# Altium PCB BlankUSB_radarESP12F.PcbDoc
Units mm, origin at the board's own origin, x right, y up, seen from the top; angles counter-clockwise.
Board outline 41.53 x 64.52 mm, 2 copper layers (Top Layer, Bottom Layer), stack 1.671 mm thick; 52 components, 30 nets, 153 pads, 30 vias.
Unrouted connection lines stored in the file: 1.
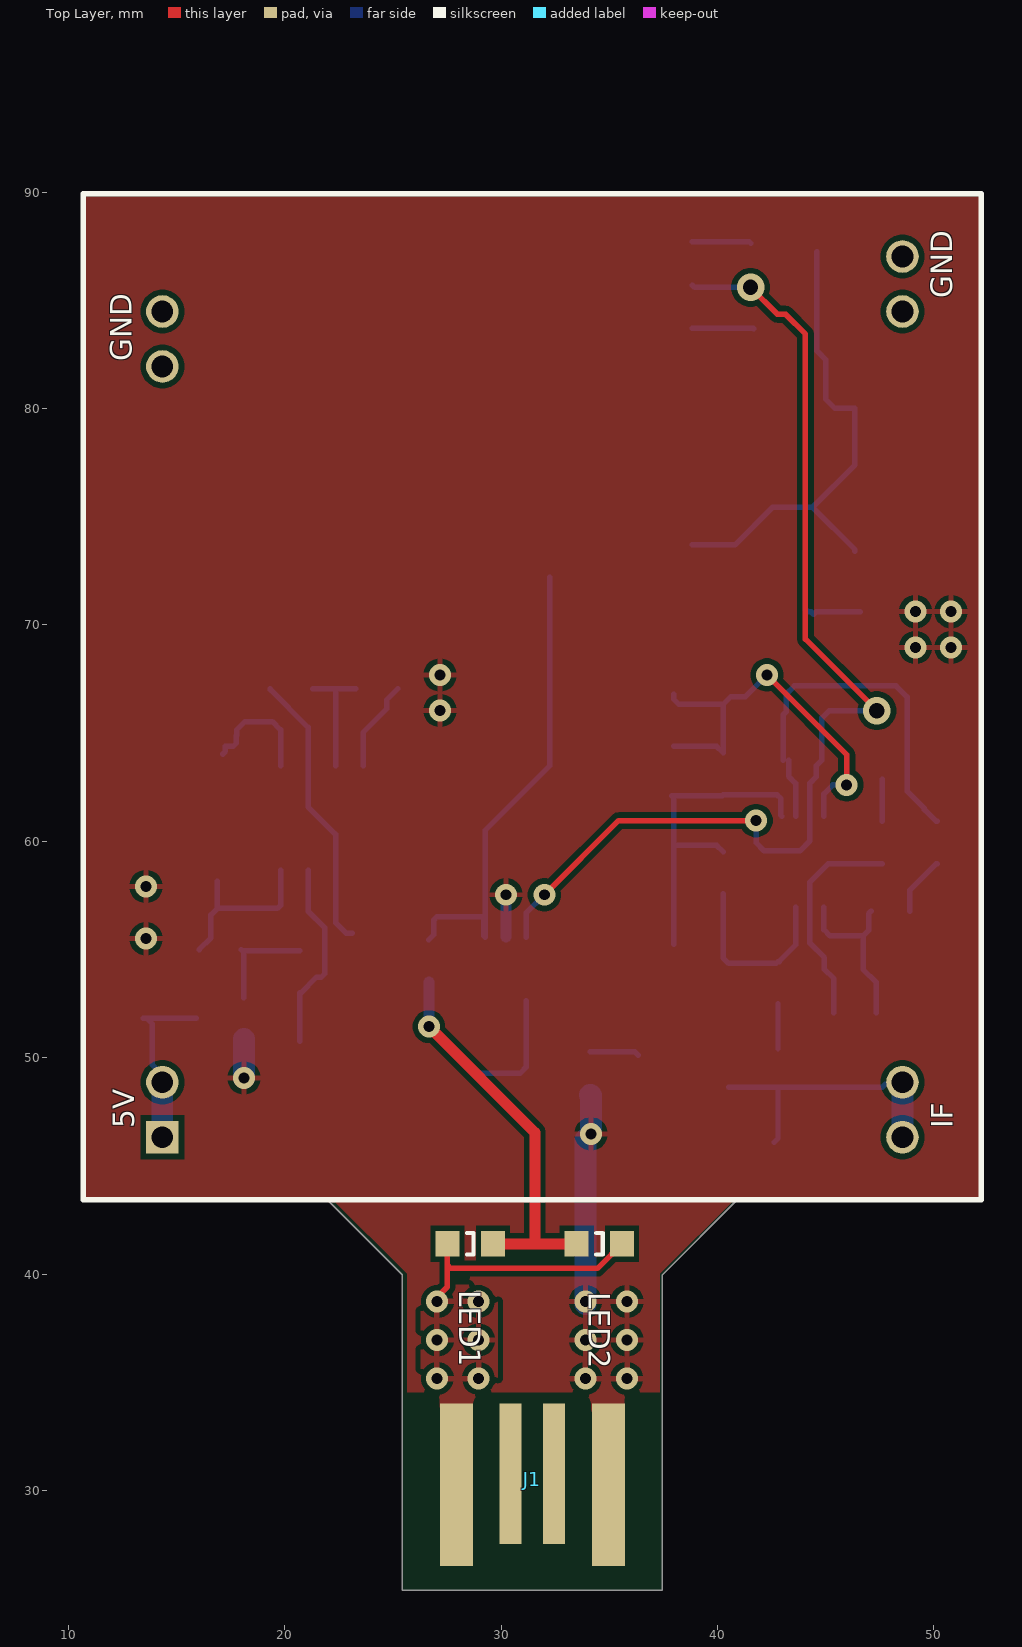
[diagram p0: Top Layer view]
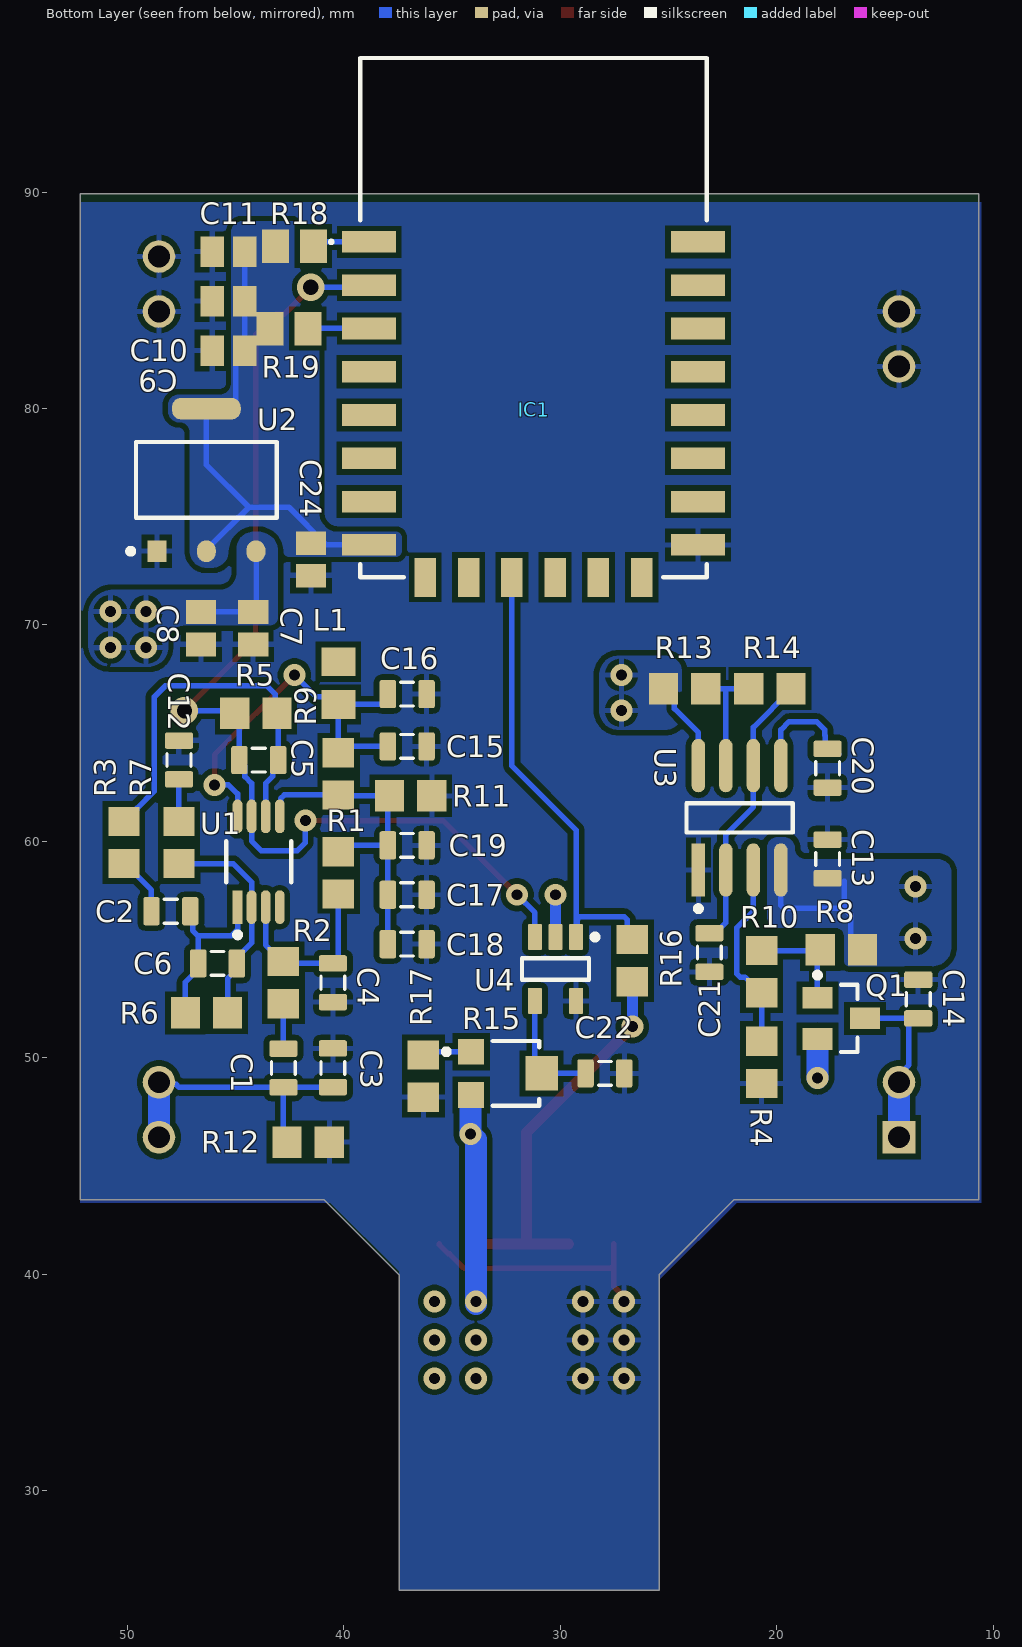
[diagram p1: Bottom Layer view, seen from below]
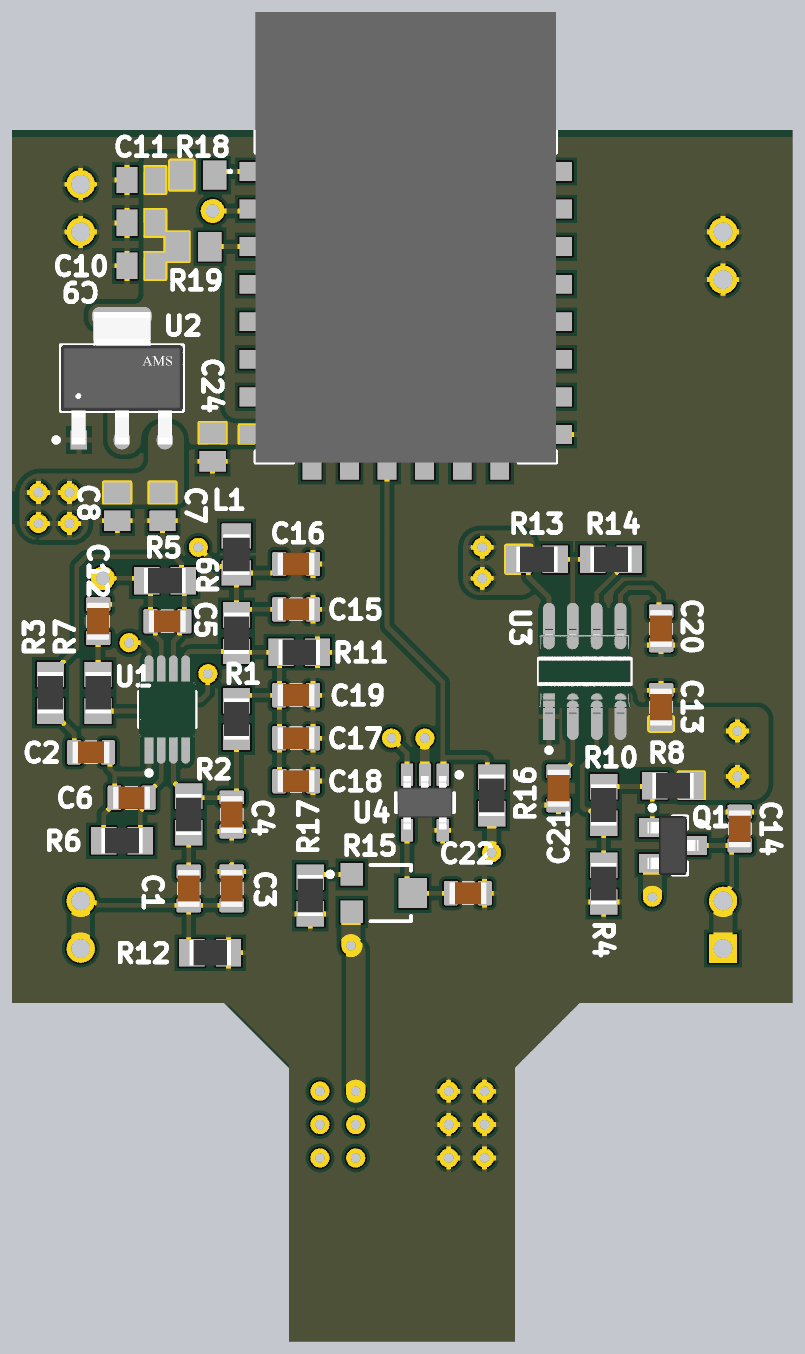
[diagram p2: 3D render of the assembled board from below, using the file's embedded part models]

## Layer stack, top to bottom
Top Solder: solder mask 0.0102, Solder Resist, Dk 3.5
Top Layer: signal copper 0.0356
Dielectric 1: dielectric 1.6, FR-4, Dk 4.8
Bottom Layer: signal copper 0.0356
Bottom Solder: solder mask 0.0102, Solder Resist, Dk 3.5

## Board outline
25.435,39.97 21.971,43.434 10.668,43.434 10.668,89.916 52.197,89.916 52.197,43.434 40.919,43.434 37.455,39.97 37.455,25.4 25.435,25.4

## Design rules (kind name [scope] priority, off if disabled: settings)
Clearance [All] p1: gap=0.254 ignorepadtopadclearanceinfootprint=FALSE
ComponentClearance [All] p1: gap=0.051 collisioncheckmode=3 verticalgap=0.051 showdistances=TRUE donotcheckwithout3dbody=TRUE checkcomponentboundary=TRUE
PolygonConnect PolygonConnect_2 [All vs IsNamedPolygon('VCC_L02_P008')] p1: thpad.connectstyle=Direct thpad.reliefconductorwidth=0.254 thpad.reliefentries=4 thpad.polygonreliefangle="90 Angle" thpad.airgapwidth=0.254 smdpad.connectstyle=Direct smdpad.reliefconductorwidth=0.254 smdpad.reliefentries=4 smdpad.polygonreliefangle="90 Angle" smdpad.airgapwidth=0.254 via.connectstyle=Relief via.reliefconductorwidth=0.254 via.reliefentries=4 via.polygonreliefangle="90 Angle" via.airgapwidth=0.254
PolygonConnect A [All vs IsNamedPolygon('+5_L01_P013') Or IsNamedPolygon('GND_L01_P011')] p2: thpad.connectstyle=Direct thpad.reliefconductorwidth=0.254 thpad.reliefentries=4 thpad.polygonreliefangle="90 Angle" thpad.airgapwidth=0.254 smdpad.connectstyle=Direct smdpad.reliefconductorwidth=0.254 smdpad.reliefentries=4 smdpad.polygonreliefangle="90 Angle" smdpad.airgapwidth=0.254 via.connectstyle=Relief via.reliefconductorwidth=0.254 via.reliefentries=4 via.polygonreliefangle="90 Angle" via.airgapwidth=0.254
PolygonConnect PolygonConnect_1 [All vs IsNamedPolygon('+5_L01_P013') Or IsNamedPolygon('GND_L01_P011') Or IsNamedPolygon('+5_L02_P003') Or IsNamedPolygon('+5_L02_P009') Or IsNamedPolygon('+5_L02_P010') Or IsNamedPolygon('VCC_L02_P008')] p3: thpad.connectstyle=Direct thpad.reliefconductorwidth=0.254 thpad.reliefentries=4 thpad.polygonreliefangle="90 Angle" thpad.airgapwidth=0.254 smdpad.connectstyle=Direct smdpad.reliefconductorwidth=0.254 smdpad.reliefentries=4 smdpad.polygonreliefangle="90 Angle" smdpad.airgapwidth=0.254 via.connectstyle=Relief via.reliefconductorwidth=0.254 via.reliefentries=4 via.polygonreliefangle="90 Angle" via.airgapwidth=0.254
PolygonConnect [All] p4: connectstyle=Relief reliefconductorwidth=0.254 reliefentries=4 polygonreliefangle="90 Angle" airgapwidth=0.254
RoutingVias [All] p1: holewidth=0.711 width=1.27 viastyle="Through Hole" minholewidth=0.711 minwidth=1.27 maxholewidth=0.711 maxwidth=1.27
SolderMaskExpansion [All] p1: expansion=0.102 istentingtop=FALSE
Width [All] p1: maxlimit=5.08 minlimit=0.254 preferedwidth=0.254
29 further rules are at their usual default settings.

## Classes and differential pairs
net class POWER: +5 HB100-5V

## Components (designator, comment, footprint, x,y, rotation, side; value= is the part's Value field where it differs from the comment)
C1 "" CAPC0805(2012)145_L 42.799,49.53 r90 bottom value=4.7uF
C2 "" CAPC0805(2012)145_L 48.006,56.769 r0 bottom value=4.7uF
C3 "" CAPC0805(2012)145_L 40.513,49.53 r270 bottom value=100nF
C4 "" CAPC0805(2012)145_L 40.513,53.467 r90 bottom value=100nF
C5 "" CAPC0805(2012)145_L 43.941,63.754 r0 bottom value=2.2n
C6 "" CAPC0805(2012)145_L 45.847,54.356 r0 bottom value=2.2nF
C7 "Cap Pol3" C0805 44.196,69.85 r270 bottom value=100u
C8 "Cap Pol3" C0805 46.609,69.851 r270 bottom value=1u
C9 "Cap Pol3" C0805 45.34,82.677 r0 bottom value=100u
C10 "Cap Pol3" C0805 45.34,84.963 r0 bottom value=10u
C11 "Cap Pol3" C0805 45.339,87.249 r0 bottom value=1u
C12 "" CAPC0805(2012)145_L 47.625,63.754 r270 bottom value=4.7uF
C13 "" CAPC0805(2012)145_L 17.653,59.182 r270 bottom value=100uF
C14 "" CAPC0805(2012)145_L 13.462,52.705 r270 bottom value=100nF
C15 "" CAPC0805(2012)145_L 37.084,64.389 r0 bottom value=1uF
C16 "" CAPC0805(2012)145_L 37.084,66.802 r0 bottom value=100nF
C17 "" CAPC0805(2012)145_L 37.084,57.531 r0 bottom value=100uF
C18 "" CAPC0805(2012)145_L 37.084,55.245 r0 bottom value=1uF
C19 "" CAPC0805(2012)145_L 37.084,59.817 r0 bottom value=100nF
C20 "" CAPC0805(2012)145_L 17.653,63.373 r270 bottom value=10nF
C21 "25nF" CAPC0805(2012)145_L 23.114,54.864 r90 bottom
C22 "" CAPC0805(2012)145_L 27.937,49.276 r180 bottom value=10uF
C24 "Cap Pol3" C0805 41.529,73.025 r270 bottom value=100n
IC1 "esp-12f" esp12f 31.242,84.201 r180 bottom locked
J1 "USB-A" USB-A-PCB 31.455,30.462 r90 top locked
L1 "BLM21PG331SN1D" INDC2013X105X50ML20T20 40.259,67.31 r270 bottom
LED1 "150080SS75000" 0805_A 28.575,41.402 r180 top
LED2 "150080SS75000" 0805_A 34.544,41.402 r180 top
Q1 "MMBT3906" FAIR-SOT23-3_V 17.018,51.816 r180 bottom
R1 "" RESC2013X70X40ML20T20 40.259,58.547 r90 bottom value=330k
R2 "" RESC2013X70X40ML20T20 42.799,53.467 r90 bottom value=12k
R3 "" RESC2013X70X40ML20T20 50.165,59.944 r90 bottom value=8.2k
R4 "" RESC2013X70X40ML20T20 20.701,49.784 r90 bottom value=1Meg
R5 "" RESC2013X70X40ML20T20 44.069,65.913 r0 bottom value=1Meg
R6 "" RESC2013X70X40ML20T20 46.355,52.07 r0 bottom value=1Meg
R7 "" RESC2013X70X40ML20T20 47.625,59.944 r270 bottom value=10k
R8 "" RESC2013X70X40ML20T20 17.018,54.991 r180 bottom value=10k
R9 "" RESC2013X70X40ML20T20 40.259,63.119 r90 bottom value=100k
R10 "" RESC2013X70X40ML20T20 20.701,53.975 r90 bottom value=10k
R11 "" RESC2013X70X40ML20T20 36.916,62.103 r0 bottom value=100k
R12 "" RESC2013X70X40ML20T20 41.656,46.101 r0 bottom value=12k
R13 "" RESC2013X70X40ML20T20 24.257,67.056 r0 bottom value=50k
R14 "" RESC2013X70X40ML20T20 20.32,67.056 r0 bottom value=2k
R15 "35WR10KLFTR" BI-35WR10KLFTR-3_V 32.52,49.276 r180 bottom
R16 "" RESC2013X70X40ML20T20 26.67,54.483 r90 bottom value=250
R17 "" RESC2013X70X40ML20T20 36.33,49.149 r90 bottom value=50k
R18 "10k" RESC2013X58X38NL25T25 42.291,87.503 r0 bottom
R19 "10k" RESC2013X58X38NL25T25 42.545,83.693 r0 bottom
U1 "LMV358IDGKR" FP-DGK0008A-IPC_B 43.942,59.055 r90 bottom
U2 "AMS1117-3.3" FP-AMS1117-IPC_C 46.359,76.701 r90 bottom
U3 "NE555DR" FP-D0008A-IPC_A 21.717,61.087 r90 bottom
U4 "LMC7211AIM5/NOPB" DBV0005A_M 30.226,54.102 r270 bottom

## Footprints (in the part's own frame and the unit in brackets; to place one, negate y for a bottom-side part, rotate by r counter-clockwise, add the part's x,y. Pads: shape width x height; smd on the part's side, far side on the other; paste and mask are expansions set on the pad)
0805_A [mm] "Chip LED, 2-Leads, Body 2.0x1.3mm, IPC Medium Density"
  rect 1.1x1.2 smd: 1(-1.05,0) 2(1.05,0)
  silkscreen extent -0.15,-0.5 0.15,0.5, body extent -1,-0.62 1,0.62, height 0.68
BI-35WR10KLFTR-3_V [mm] "SMD, 3-Leads, Body 3x3.1mm"
  rect 1.2x1.2 smd: 1(-1.6,1) 3(-1.6,-1)
  rect 1.5x1.6 smd: 2(1.65,0)
  silkscreen extent -2.88,-1.5 1.55,1.5, body extent -1.55,-1.5 1.55,1.5, height 1.8
C0805 [mm] "Chip Capacitor, Body 2.0x1.3mm, IPC High Density"
  rect 1.1x1.4 smd: 1(-0.75,0) 2(0.75,0)
  body extent -1.1,-0.72 1.1,0.72, height 1.4
CAPC0805(2012)145_L [mm] "Chip Capacitor, Body 2.0x1.2mm, Height 1.45mm, IPC High Density"
  rrect25% 0.76x1.3 smd: 1(-0.9,0) 2(0.89,0)
  silkscreen extent -0.3,-0.55 0.3,0.55, body extent -1,-0.6 1,0.6, height 1.45
DBV0005A_M [mm] "SOT23, 5-Leads, Body 3.05x1.75mm, Pitch 0.95mm, IPC Low Density"
  rrect15% 1.2x0.65 smd: 1(-1.475,0.95) 2(-1.475,0) 3(-1.475,-0.95) 4(1.475,-0.95) 5(1.475,0.95)
  silkscreen extent -1.6,-1.55 0.5,1.95, body extent -1.42,-1.46 1.42,1.46, height 1.08
esp12f [mm]
  rect 2.5x1 smd: 1(-7.6,3.5) 2(-7.6,1.5) 3(-7.6,-0.5) 4(-7.6,-2.5) 5(-7.6,-4.5) 6(-7.6,-6.5) 7(-7.6,-8.5) 8(-7.6,-10.5) 15(7.6,-10.5) 16(7.6,-8.5) 17(7.6,-6.5) 18(7.6,-4.5) 19(7.6,-2.5) 20(7.6,-0.5) 21(7.6,1.5) 22(7.6,3.5)
  rect 1x1.8 smd: 9(-5,-12) 10(-3,-12) 11(-1,-12) 12(1,-12) 13(3,-12) 14(5,-12)
  silkscreen extent -9.4,-12 8,12, body extent -8,-12 8,12, height 3.2
FAIR-SOT23-3_V [mm] "SOT23, 3-Leads, Body 3.12x1.5mm, Pitch 0.95mm"
  rect 1.4x1 smd: 1(-1.1,0.95) 2(-1.1,-0.95) 3(1.1,0)
  silkscreen extent -1.23,-1.55 0.75,2.12, body extent -1.35,-1.56 1.35,1.56, height 1.2
FP-AMS1117-IPC_C [mm]
  rect 1.004x0.872 smd paste+0 mask+0: 1(-3.295,2.29)
  rrect100% 1.004x0.872 smd paste+0 mask+0: 2(-3.295,0) 3(-3.295,-2.29)
  rrect87% 1.004x3.182 smd paste+0 mask+0: 4(3.295,0)
  silkscreen extent -3.42,-3.25 1.75,3.63, body extent -3.53,-3.25 3.53,3.25, height 1.8
FP-D0008A-IPC_A [mm]
  rect 2.469x0.622 smd paste+0 mask+0: 1(-2.414,1.905)
  rrect100% 2.469x0.622 smd paste+0 mask+0: 2(-2.414,0.635) 3(-2.414,-0.635) 4(-2.414,-1.905) 5(2.414,-1.905) 6(2.414,-0.635) 7(2.414,0.635) 8(2.414,1.905)
  silkscreen extent -4.32,-2.45 0.68,2.45, body extent -3,-2.45 3,2.45, height 1.75
FP-DGK0008A-IPC_B [mm]
  rect 1.557x0.458 smd paste+0 mask+0: 1(-2.101,0.975)
  rrect100% 1.557x0.458 smd paste+0 mask+0: 2(-2.101,0.325) 3(-2.101,-0.325) 4(-2.101,-0.975) 5(2.101,-0.975) 6(2.101,-0.325) 7(2.101,0.325) 8(2.101,0.975)
  silkscreen extent -3.5,-1.5 0.95,1.5, body extent -2.45,-1.5 2.45,1.5, height 1.1
INDC2013X105X50ML20T20 [mm] "Chip Inductor, 2-Leads, Body 2.2x1.45mm, IPC Low Density"
  rect 1.33x1.57 smd: 1(-0.985,0) 2(0.985,0)
  body extent -1.1,-0.72 1.1,0.72, height 1.05
RESC2013X58X38NL25T25 [mm] "Chip Resistor, 2-Leads, Body 2.03x1.27mm, IPC Medium Density"
  rect 1.25x1.55 smd: 1(-0.875,0) 2(0.875,0)
  body extent -1.14,-0.76 1.14,0.76, height 0.59
RESC2013X70X40ML20T20 [mm] "Chip Resistor, 2-Leads, Body 2.2x1.35mm, IPC Low Density"
  rect 1.35x1.45 smd: 1(-0.975,0) 2(0.975,0)
  body extent -1.1,-0.68 1.1,0.67, height 0.7
USB-A-PCB [mil]
  rect 296x60 smd paste-196.85: 1(-7.87,-137.8) 4(-7.87,138)
  rect 256x40 smd paste-196.85: 2(12,-39.37) 3(12,40)

## Part data
C1 C2 C3 C4 C5 C6 C12 C13 C14 C15 C16 C17 C18 C19 C20 C21 C22: library part CMP-001-00054-3, Case/Package=0805, Max Operating Temperature=85°C, Min Operating Temperature=-55°C, Tolerance=10%, Voltage Rating=6.3V, Mounting Technology=SMT, Pins=2
C7 C8 C9 C10 C11 C24: "Polarized Capacitor (Surface Mount)", LatestRevisionDate=29-May-2009, LatestRevisionNote="IPC-7351 Footprint Added.", PackageDescription="Chip Capacitor", PackageReference=C0805, Published=8-Jun-2000, Publisher="Altium Limited"
IC1: "Integrated Circuit", Manufacturer_Name=Ai-Thinker, Datasheet Link=https://docs.ai-thinker.com/_media/esp8266/docs/esp-12f_product_specification_en.pdf, Height=3.1mm, Manufacturer_Part_Number=esp-12f
J1: library part USB-A-PCB, "USB-A PCB footprint", Part number IPS=N.A., Artikkelnr Noca=N.A., ComponentLink1Description=Datasheet, ComponentLink2Description="Supplier link", Footprint Doc=USB-A-PCB, LatestRevisionDate=2014-06-04, Part Number=USB-A-PCB, Pin Count=4, Published=2014-06-04, Publisher="Nordic Semiconductor"
L1: library part CMP-006-00000-3, "IND, Chip Ferrite Bead, 330 Ohm, +/- 25%, 1.5 A, -55 to 125 degC, 0805 (2012 Metric), Tape and Reel", Case/Package=0805, Current Rating=1.5A, Manufacturer=Murata, Max Operating Temperature=125°C, Min Operating Temperature=-55°C, Package Description="2-Pin Surface Mount Device, Body 2 x1.25 mm", Package Quantity=4000, Resistance=90mohm, Tolerance=25%, Core Material=Ferrite, Datasheet URL=http://psearch.en.murata.com/inductor/product/LQG15HS15NJ02_.pdf, Datasheet Version=Nov-11, Impedance=330Ohm, Max Current Rating=1.5A, Mounting Technology=SM, Package Reference=0805, Packaging=TapeandReel, RoHS Compliant=True
LED1 LED2: library part CMP-1426-00010-1, "SMD mono-color Chip LED, WL-SMCW, Super Red", Color="Super Red", Manufacturer="Wuerth Elektronik", ComponentLink1Description="Manufacturer URL", ComponentLink1URL=http://www.we-online.com, ComponentLink2Description=Datasheet, ComponentLink2URL=http://katalog.we-online.com/led/datasheet/150080SS75000.pdf, PackageReference=0805_A, PartNumber=150080SS75000
Q1: library part CMP-013-00008-2, "PNP General-Purpose Amplifier, 40 V, 0.2 A, -55 to 150 degC, 3-Pin SOT23, RoHS, Tape and Reel", Case/Package=TO-236-3, Frequency=250MHz, Manufacturer=Fairchild, Max Operating Temperature=150°C, Min Operating Temperature=-55°C, Package Description="3-Pin Small Outline Transistor, Body 2.92 x 1.325 mm, Pitch 0.95 mm", Package Quantity=3000, Package Reference=SOT23-3, Package Version="Rev. 12, 03/2016", Power=350mW, Datasheet URL=https://www.fairchildsemi.com/datasheets/MM/MMBT3906.pdf, Datasheet Version="Rev. 1.2.2, 04/2014", Elements=1, Hfe Min=100, Mounting Technology=SM, Packaging=TapeandReel, Pins=3, RoHS Compliant=True, Vce Max=400mV
R1 R2 R3 R4 R5 R6 R7 R8 R9 R10 R11 R12 R13 R14 R16 R17: library part CMP-009-00024-4, Case/Package=0805, Max Operating Temperature=155°C, Min Operating Temperature=-55°C, Power=125mW, Tolerance=1%, Voltage Rating=150V, Mounting Technology=SM, Pins=2, RoHS Compliant=True
R15: library part CMP-009-00041-1, "3 mm Single-Turn Open Frame Surface Mount Cermet Trimming Potentiometer, +/- 25%, 35 W, -40 to 125 degC, 3-Pin SMD, RoHS, Tape and Reel", Manufacturer="BI Technologies", Max Operating Temperature=125°C, Min Operating Temperature=-40°C, Package Description="3-Pin Surface Mount Device, Body 3 x 3.1 mm", Package Quantity=2000, Power=100mW, Resistance=10k, Tolerance=25%, Voltage Rating=50V, Case/Package=35WR10KLFTR, Composition=Potentiometer, Datasheet URL=http://www.bitechnologies.com/pdfs/35.pdf, Datasheet Version=Feb-10, Manufacturer URL=http://www.bi-technologies.net/, Mounting Technology=SM, Package Reference=35WR10KLFTR, Packaging=TapeandReel, RoHS Compliant=True
R18 R19: library part CMP-2001-04325-1, Manufacturer="Vishay Dale", Part Number=WSLP0805R0400FEA
U1: library part CMP-2100-03651-2, "IC OPAMP GP 2 CIRCUIT 8VSSOP", Case/Package=MSOP, Input Bias Current=250nA, Input Offset Voltage (Vos)=7mV, Max Operating Temperature=125°C, Max Supply Voltage=5.5V, Min Operating Temperature=-40°C, Min Supply Voltage=2.7V, Nominal Supply Current=440uA, Operating Supply Current=210uA, Output Current=160mA, Package Quantity=1, Power Supply Rejection Ratio (PSRR)=50dB, Voltage Gain=100dB, Bandwidth=1MHz, Common Mode Rejection Ratio=50dB, Contact Plating=Gold, Gain Bandwidth Product=1MHz, Height=0.97mm, Lead Free="Lead Free", Length=3mm, Mount="Surface Mount", Number of Amplifiers=2, Number of Channels=2, Number of Circuits=2, Number of Elements=2, Number of Pins=8, Output Current per Channel=160mA, Packaging="Tape and Reel", Radiation Hardening=No, REACH SVHC="No SVHC", Slew Rate=1V/µs, Unity Gain Bandwidth Product=1MHz, Width=3mm
U2: library part CMP-209535-000001-1, "LDO Voltage Regulators 1A, 3.3V", Dropout Voltage=1.1V, Manufacturer="Advanced Monolithic Systems", Max Junction Temp=+125°C, Max Power Dissipation=1.2W, Max Supply Voltage=15V, Nominal Supply Current=5mA, Output Current=1A, Output Voltage=3.3V, Package=AMS1117, Temperature="-40°C to +125°C", Temperature Range Low=-40°C, Automotive=No, Category=IC, ComponentLink2Description=Datasheet, ComponentLink2URL=http://www.advanced-monolithic.com/pdf/ds1117.pdf, Device Class L1="Integrated Circuits (ICs)", Device Class L2="Power Management ICs", Device Class L3="Voltage Regulators - Linear", Height=1.8mm, Ipc Land Pattern Name=SOT229P700X180-4, Lead Free=Yes, Manufacturer Part Number=AMS1117-3.3, Number Of Outputs=1, Octopart=https://octopart.com/ams1117-3.3-advanced+monolithic+systems-25899300, Output Type=Fixed, RoHs=TRUE, Standoff Height=0.64mm, Temperature Range High=+125°C
U3: library part CMP-1685-00007-2, "IC OSC SGL TIMER 100KHZ 8-SOIC", Case/Package=SOIC, Frequency=100kHz, High Level Output Current=-200mA, Low Level Output Current=200mA, Max Operating Temperature=70°C, Max Supply Voltage=16V, Min Operating Temperature=0°C, Min Supply Voltage=4.5V, Operating Supply Current=10mA, Package Quantity=2500, Quiescent Current=15mA, Contact Plating=Gold, Height=1.58mm, Lead Free="Lead Free", Length=4.9mm, Mount="Surface Mount", Number of Pins=8, Number of Timers/Counters=1, Packaging="Tape and Reel", Radiation Hardening=No, REACH SVHC="No SVHC", Weight=0.002561oz, Width=3.91mm
U4: library part CMP-0055-01212-3, "Tiny CMOS Comparator with Rail-to-Rail Input, 5-pin SOT-23, Pb-Free", Manufacturer="Texas Instruments", Package Reference=DBV0005A, PackageTopMarking=C00A*XTT, PowerWise=N, ComponentLink1Description="Datasheet URL", ComponentLink1URL=http://www.ti.com/general/docs/lit/getliterature.tsp?genericPartNumber=LMC7211-N&fileType=pdf, CompType=Amplifiers, PackageDescription="Molded SOT-23, .115 x .063 x .040 in Body, 5 Lead, .0375 in Pitch", PinCount=5, RoHs=Y

## Free pads (board coordinates)
  rect 1.508x1.508 hole 1: 1(14.351,46.325)
  round 1.508 hole 1: 2(14.351,48.865) 3(48.551,46.325) 4(48.551,48.865) 5(48.551,87.025) 6(48.551,84.485) 7(14.351,84.485) 8(14.351,81.945)

## Via types
v1: diameter 1.016, hole 0.508, Top Layer to Bottom Layer, 28 vias
v2: diameter 1.27, hole 0.711, Top Layer to Bottom Layer, 2 vias

## Nets (pads, with @x,y where several pads share a name; then routed paths per layer and width w, separated by ;. In a path a pad name is that pad's centre, name@x,y a point inside that pad or via, vN(x,y) a via of type N, cw(c..) or ccw(c..) an arc to the next point about the centre after c; other vN are vias at no path point)
5V: L1.1
+5: C7.1 C8.1 C13.2 J1.1 Q1.2 R8.2 R13.2 R15.3 U2.3 U3.4 U3.8 U4.2 | length 31.3
  Bottom Layer w0.254: R8.2 16.591,55.539 16.591,56.6 16.891,56.901 ; 16.891,58.165 16.891,56.901 ; U3.4 19.812,57.045 19.663,56.896 16.896,56.896 16.891,56.901 ; U3.8 23.622,65.024 24.728,66.13 24.728,66.552 R13.2 ; U2.3@44.065,73.413 44.065,70.731 C7.1 44.335,70.6 44.45,70.485 44.566,70.601 C8.1
  Bottom Layer w0.508: U4.2 v1(30.226,57.531)
  Bottom Layer w1.016: v1(18.116,49.063) 18.118,49.063 Q1.2 ; v1@33.909,38.608 33.909,46.228 v1(34.163,46.482) 34.163,48.233 ccw(c34.12,48.233) R15.3
  other v1: 33.909,35.179 35.814,35.179 33.909,36.957 35.814,36.957 33.909,38.735 35.814,38.735 13.589,55.499 13.589,57.912 27.178,66.04 27.178,67.691 49.149,68.961 50.8,68.961 49.149,70.612 50.8,70.612
AGND: U1.4
COMP: IC1.11 R16.2 U4.1 | length 22.1
  Bottom Layer w0.254: R16.2 26.901,55.689 26.901,56.365 27.051,56.515 29.083,56.515 29.21,56.388 29.21,55.643 U4.1 29.276,60.518 32.242,63.484 IC1.11
D-: J1.2
GND: C3.1 C4.1 C7.2 C8.2 C9.2 C10.2 C11.2 C12.1 C13.1 C14.1 C15.1 C16.1 C17.1 C18.1 C19.1 C20.2 C21.1 C22.2 C24.2 IC1.15 J1.4 LED1.2 LED2.1 pad.5 pad.6 pad.7 pad.8 R4.1 R11.1 R12.1 R17.1 U2.1 U3.1 U4.5 | length 11.5
  Top Layer w0.254: v1(27.051,38.735) 27.051,38.941 27.525,39.415 27.525,40.409 ; LED1.2 27.525,40.409 ; LED2.1 35.594,41.352 35.171,40.929 35.121,40.929 34.451,40.259 27.675,40.259 27.525,40.409
  other v1: 27.051,35.179 28.956,35.179 27.051,36.957 28.956,36.957 28.956,38.735
HB100-5V: C14.2 pad.1 pad.2 Q1.3 | length 8.2
  Bottom Layer w0.254: C14.2 C14.2@13.637,51.815 ; pad.2 14.351,49.204 13.89,49.665 13.89,51.562 C14.2@13.637,51.815 ; Q1.3 Q1.3 C14.2@13.637,51.815
  Bottom Layer w1: pad.1 pad.2
HB100-5V-SW: R4.2 R10.1 U3.3 | length 8.9
  Bottom Layer w0.254: R4.2 R10.1 20.751,53 21.472,53.721 21.695,53.721 21.844,53.87 21.844,56.007 21.082,56.769 U3.3
IF_HB100: C1.1 C3.2 pad.3 pad.4 R12.2 | length 13.3
  Bottom Layer w0.254: C3.2 40.518,48.635 42.794,48.635 C1.1 ; R12.2 42.799,46.269 C1.1 ; pad.4 48.454,48.768 47.752,48.768 47.614,48.63 C1.1
  Bottom Layer w1: pad.3 pad.4
NetC1_2: C1.2 R2.1 | length 2.1
  Bottom Layer w0.254: C1.2 R2.1
NetC2_2: C2.2 R3.1 | length 2.8
  Bottom Layer w0.254: C2.2 48.896,57.75 50.115,58.969 R3.1
NetC12_2: C12.2 R7.1 | length 1.9
  Bottom Layer w0.254: R7.1 C12.2
NetC20_1: C20.1 U3.5 | length 5.6
  Bottom Layer w0.254: C20.1@17.13,64.024 17.264,64.158 17.264,64.392 17.623,64.392 17.757,64.526 17.757,64.885 17.778,64.906 17.778,65.149 18.161,65.532 19.431,65.532 19.812,65.151 U3.5
NetC21_2: C21.2 R14.1 U3.2 U3.6 | length 13
  Bottom Layer w0.254: R14.1 19.345,67.006 21.082,65.269 U3.6 21.082,61.595 22.352,60.325 U3.2 22.352,56.246 22.844,55.754 C21.2
NetC22_1: C22.1 R15.2 U4.4 | length 5.5
  Bottom Layer w0.254: C22.1 R15.2 31.176,49.582 U4.4
NetIC1_1: IC1.1 R18.1 | length 2.7
  Bottom Layer w0.254: IC1.1 41.472,87.701 R18.1@41.543,87.63
NetIC1_3: IC1.3 R19.1 | length 2.8
  Bottom Layer w0.254: IC1.3 41.662,83.701 R19.1
NetLabel11: IC1.13
NetLED1_1: LED1.1 LED2.2 R16.1 | length 18
  Top Layer w0.508: v1(26.67,51.435) 31.559,46.545 31.559,41.402 ; LED1.1 31.559,41.402 ; LED2.2 31.559,41.402
  Bottom Layer w0.508: v1(26.67,51.435) R16.1
NetQ1_1: Q1.1 R8.1 R10.2 | length 4.9
  Bottom Layer w0.254: R8.1 R8.1@18.034,54.95 ; Q1.1 18.118,54.866 R8.1@18.034,54.95 ; R10.2 R8.1@18.034,54.95
NetR13_1: R13.1 R14.2 U3.7 | length 5.6
  Bottom Layer w0.254: R14.2 22.289,67.056 ; U3.7 22.352,66.993 22.289,67.056 ; R13.1 22.289,67.056
NetR15_1: R15.1 R17.2 | length 2.3
  Bottom Layer w0.254: R15.1 36.178,50.276 R17.2
OP_AMP1IN+: C4.2 R1.1 R2.2 U1.3 | length 8.5
  Bottom Layer w0.254: R1.1 40.259,54.61 C4.2 ; C4.2 42.714,54.357 R2.2 42.849,54.442 43.617,55.21 U1.3
OP_AMP1IN-: C6.1 R6.1 R7.2 U1.2 | length 10.2
  Bottom Layer w0.254: R6.1 45.38,53.653 44.947,54.086 C6.1 44.947,54.626 44.267,55.306 U1.2 44.27,56.958 44.27,58.113 45.126,58.969 R7.2
OP_AMP1OUT: C2.1 C6.2 R6.2 U1.1 | length 8.1
  Bottom Layer w0.254: U1.1 44.917,55.921 45.212,55.626 46.736,55.626 ; C2.1 46.99,56.653 46.99,55.88 46.736,55.626 ; R6.2 47.33,53.493 46.737,54.086 C6.2 46.737,55.625 46.736,55.626
OP_AMP2IN+: C17.2 C18.2 C19.2 R1.2 R9.1 R11.2 U1.5 | length 15.3
  Bottom Layer w0.254: C18.2 C17.2 C19.2 ; R1.2 39.964,59.817 C19.2 ; U1.5 42.928,61.195 42.928,61.974 42.758,62.144 R9.1 40.218,62.103 R11.2 37.974,62.02 C19.2
OP_AMP2IN-: C5.1 R3.2 R5.1 U1.6 | length 18.2
  Bottom Layer w0.254: C5.1 43.041,65.86 R5.1 43.18,65.999 43.18,66.802 43.561,67.183 48.26,67.183 48.768,66.675 48.768,62.316 49.567,61.517 49.567,61.467 50.115,60.919 R3.2 ; C5.1@43.296,63.754 43.296,63.003 43.617,62.682 U1.6
OP_AMP2OUT: C5.2 IC1.2 R5.2 U1.7 U4.3 | length 50.9
  Top Layer w0.254: v1(32.004,57.531) 35.433,60.96 v1(41.783,60.96) ; v2(41.529,85.598) 42.769,84.358 43.15,84.358 44.069,83.439 44.069,69.342 v2(47.371,66.04)
  Bottom Layer w0.254: U4.3 31.176,56.703 v1(32.004,57.531) ; IC1.2 38.945,85.598 v2(41.529,85.598) ; v1(41.783,60.96) 41.783,59.944 42.164,59.563 43.815,59.563 44.267,60.015 U1.7 44.267,62.682 44.578,62.993 44.578,63.501 C5.2 44.831,65.7 R5.2 45.171,66.04 v2(47.371,66.04)
OP_AMP_VDD: C15.2 C16.2 L1.2 R9.2 U1.8 | length 18.7
  Top Layer w0.254: v1(42.291,67.691) 45.974,64.008 v1(45.974,62.611)
  Bottom Layer w0.254: C15.2 39.964,64.389 R9.2 L1.2 ; C16.2 37.974,66.578 38.227,66.325 L1.2 ; v1(42.291,67.691) 41.276,66.676 40.61,66.676 L1.2 ; U1.8 44.917,62.189 45.339,62.611 v1(45.974,62.611)
VCC: C9.1 C10.1 C11.1 C24.1 IC1.8 R18.2 R19.2 U2.2 U2.4 | length 23
  Bottom Layer w0.254: IC1.8 40.808,73.701 42.545,75.438 44.396,75.438 ; C11.1 C10.1 C9.1 45.013,82.254 45.013,80.424 45.434,80.003 46.355,80.003 46.355,77.397 44.396,75.438 ; U2.2@46.355,73.413 46.355,73.479 44.396,75.438
pads on no net: IC1.4 IC1.5 IC1.6 IC1.7 IC1.9 IC1.10 IC1.12 IC1.14 IC1.16 IC1.17 IC1.18 IC1.19 IC1.20 IC1.21 IC1.22 J1.3

## Polygon pours and split planes (outlines as drawn)
VCC on Bottom Layer "VCC_L02_P008" (solid, pour order 8): 45.339,73.406 ccw(c44.196,73.406) 44.196,74.549 43.942,74.549 ccw(c43.942,73.406) 42.799,73.406 cw(c42.545,73.406) 42.545,73.152 37.592,73.152 cw(c37.592,73.406) 37.338,73.406 37.338,74.041 cw(c37.592,74.041) 37.592,74.295 40.259,74.295 ccw(c40.259,75.184) 41.148,75.184 41.148,88.011 cw(c41.783,88.011) 41.783,88.646 44.704,88.646 cw(c44.704,88.138) 45.212,88.138 45.212,81.153 ccw(c45.72,81.153) 45.72,80.645 47.625,80.645 cw(c47.625,80.137) 48.133,80.137 48.133,79.883 cw(c47.625,79.883) 47.625,79.375 ccw(c47.625,78.867) 47.117,78.867 47.117,73.406 cw(c46.355,73.406) 46.355,72.644 46.101,72.644 cw(c46.101,73.406)
GND on Bottom Layer "GND_L02_P015" (solid, pour order 15): 37.455,25.4 37.455,40.122 40.64,43.307 52.197,43.307 52.197,89.535 10.541,89.535 10.541,43.307 21.844,43.307 25.4,39.751 25.4,25.4
+5 on Bottom Layer "+5_L02_P010" (solid, pour order 10): 12.827,54.229 cw(c12.827,55.118) 11.938,55.118 11.938,58.547 cw(c12.573,58.547) 12.573,59.182 18.669,59.182 ccw(c18.669,59.69) 19.177,59.69 cw(c19.685,59.69) 19.685,60.198 19.939,60.198 cw(c19.939,59.69) 20.447,59.69 20.447,56.515 cw(c19.939,56.515) 19.939,56.007 17.272,56.007 ccw(c17.272,55.626) 16.891,55.626 16.891,54.483 cw(c16.637,54.483) 16.637,54.229
+5 on Bottom Layer "+5_L02_P009" (solid, pour order 9): 27.305,68.58 cw(c27.305,67.691) 28.194,67.691 28.194,66.04 cw(c27.305,66.04) 27.305,65.151 25.146,65.151 cw(c25.146,65.913) 24.384,65.913 24.384,67.818 cw(c25.146,67.818) 25.146,68.58
+5 on Bottom Layer "+5_L02_P003" (solid, pour order 3): 50.673,71.628 cw(c50.673,70.485) 51.816,70.485 51.816,69.088 cw(c50.8,69.088) 50.8,68.072 49.022,68.072 cw(c49.022,68.961) 48.133,68.961 48.133,69.215 ccw(c47.371,69.215) 47.371,69.977 43.434,69.977 cw(c43.434,70.358) 43.053,70.358 43.053,73.406 cw(c43.942,73.406) 43.942,74.295 44.196,74.295 cw(c44.196,73.533) 44.958,73.533 44.958,72.39 ccw(c45.72,72.39) 45.72,71.628
+5 on Top Layer "+5_L01_P014" (solid, pour order 14): 37.338,34.544 37.338,40.005 40.894,43.561 52.07,43.561 52.07,89.789 10.795,89.789 10.795,43.561 22.098,43.561 25.654,40.005 25.654,34.544
GND on Top Layer "GND_L01_P011" (solid, pour order 11): 28.702,33.401 28.702,34.036 cw(c29.083,34.036) 29.083,34.417 ccw(c29.083,35.179) 29.845,35.179 29.845,38.735 ccw(c29.083,38.735) 29.083,39.497 26.924,39.497 ccw(c26.924,38.862) 26.289,38.862 26.289,35.052 ccw(c26.924,35.052) 26.924,34.417 cw(c26.924,34.163) 27.178,34.163 27.178,33.909 ccw(c27.432,33.909) 27.432,33.655 28.321,33.655
+5 on Top Layer "+5_L01_P013" (solid, pour order 13): 34.163,33.782 34.163,34.036 ccw(c33.782,34.036) 33.782,34.417 cw(c33.782,35.179) 33.02,35.179 33.02,38.862 cw(c33.782,38.862) 33.782,39.624 35.941,39.624 cw(c35.941,38.862) 36.703,38.862 36.703,35.179 cw(c35.941,35.179) 35.941,34.417 ccw(c35.941,34.163) 35.687,34.163 35.687,33.909 cw(c35.306,33.909) 35.306,33.528 34.417,33.528 cw(c34.417,33.782)

## Silkscreen, mask and mechanical layers (free items; w line width, h text height)
Top Overlay:
  lines w0.254: 10.701,43.425 52.201,43.425 52.201,89.925 10.701,89.925 10.701,43.425
  text "GND" at 50.848,85.099 h1 r90
  text "GND" at 12.923,82.174 h1 r90
  text "5V" at 13.051,46.75 h1 r90
  text "IF" at 50.873,46.749 h1 r90
Mechanical 15:
  the board outline again, w0.127

## Text inside footprints (layer, text, board x,y; h text height)
J1: Top 3D Body "0.030in [0.75mm]" at 12.352,13.362 h2.29 r180; Top 3D Body "45" at 13.704,-20.291 h2.29 r180; Top 3D Body "o" at 9.577,-22.831 h1.22 r180; Top 3D Body "DETAIL A" at 31.402,-34.263 h3.81 r180; Top 3D Body "0.025in [0.625mm]" at 56.235,-5.789 h2.29 r180